# Altium PCB PCB2.PcbDoc
Units mil, origin at the board's own origin, x right, y up, seen from the top; angles counter-clockwise.
Board outline 3875 x 4900 mil, 2 copper layers (Top Layer, Bottom Layer); 33 components, 42 nets, 163 pads, 23 vias.
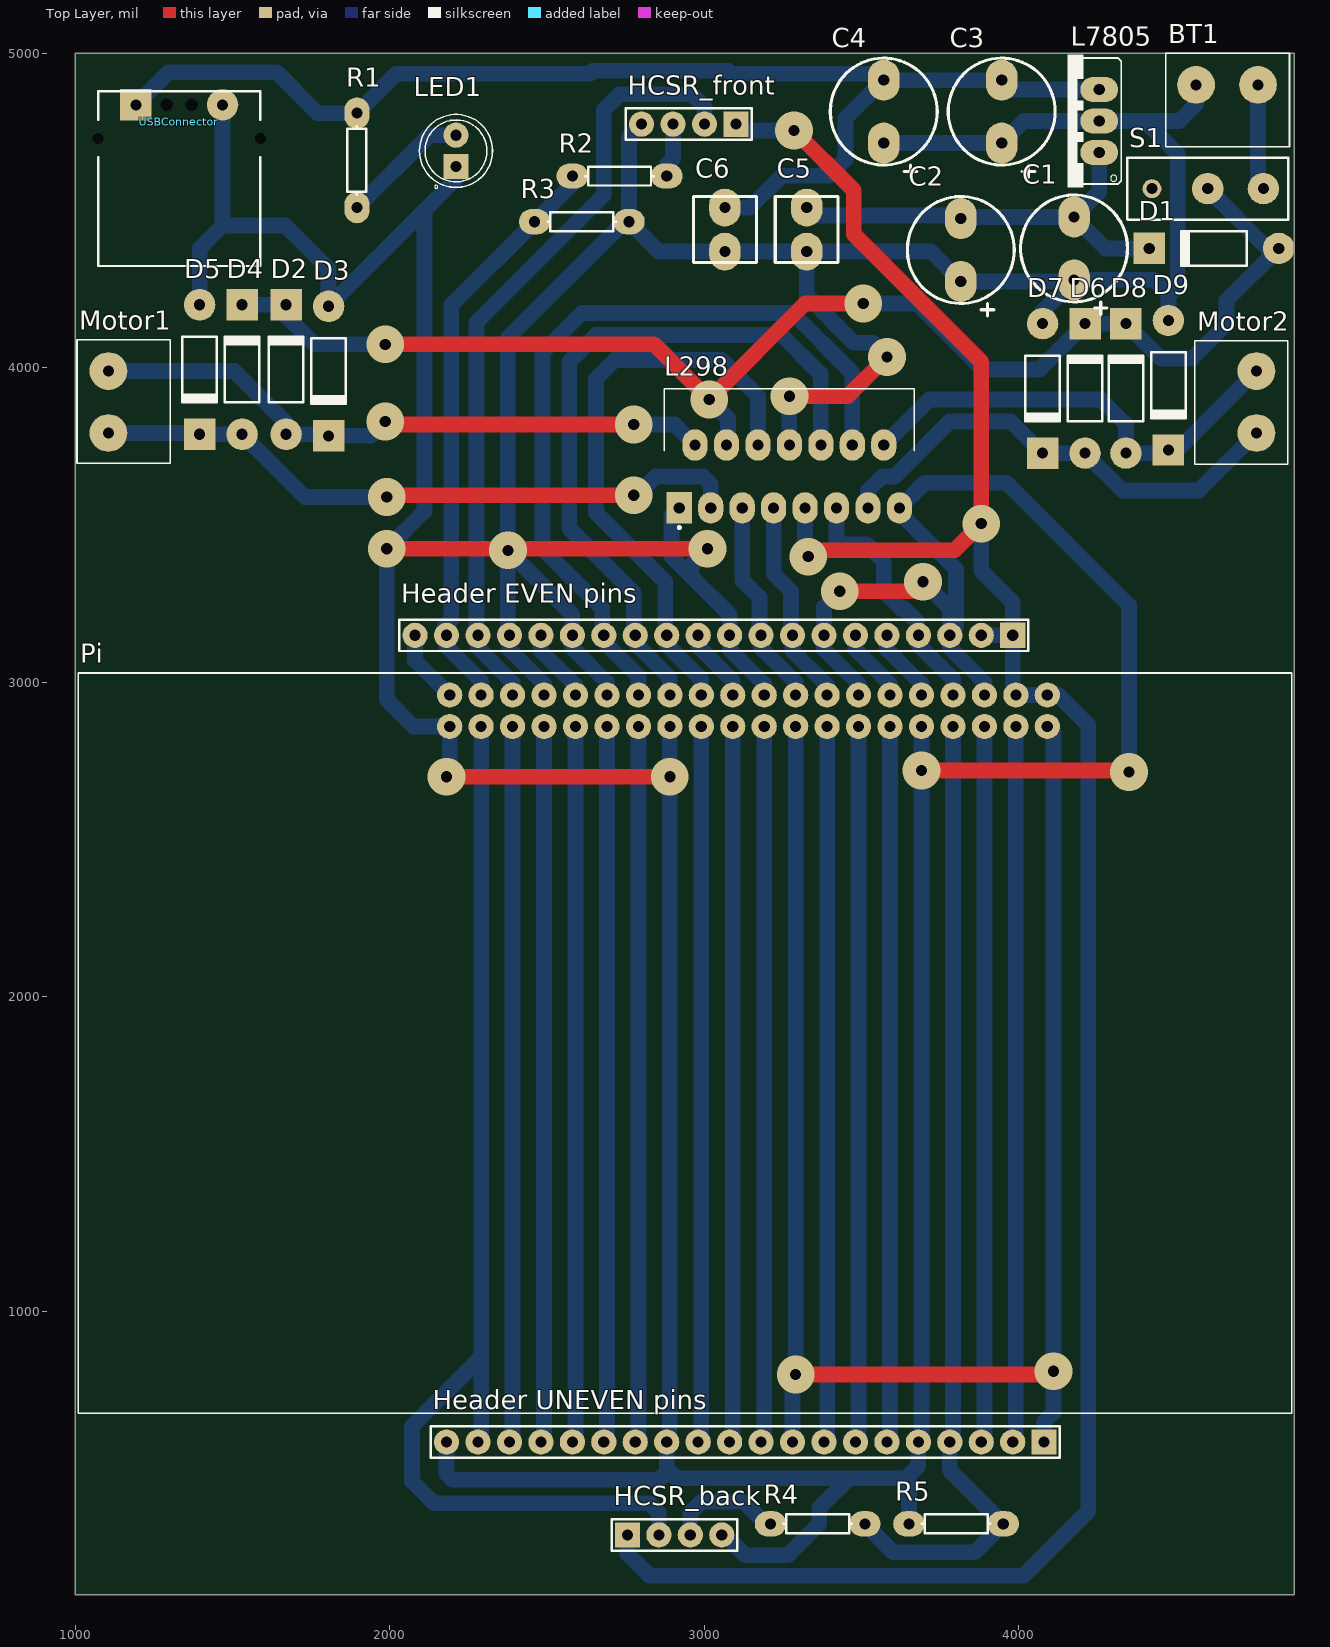
[diagram p0: Top Layer view]
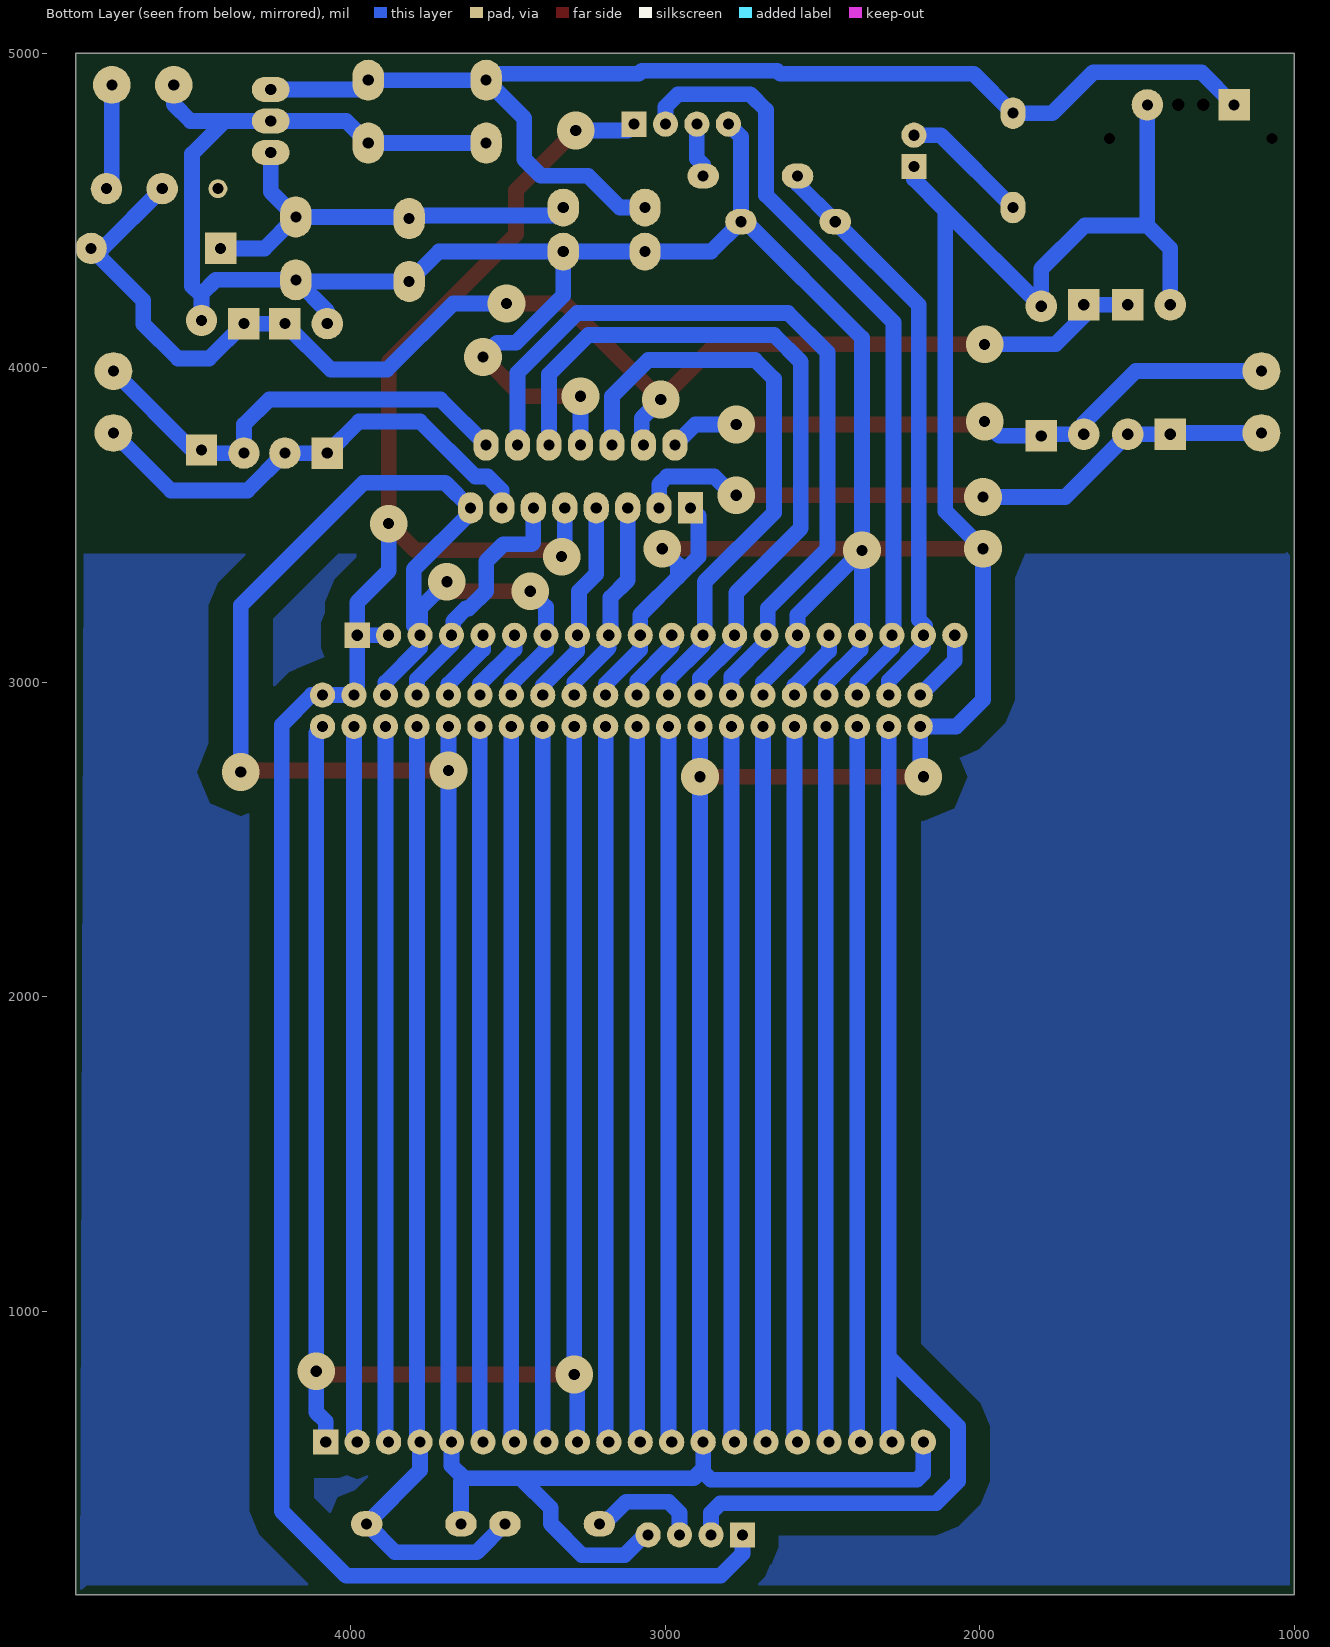
[diagram p1: Bottom Layer view, seen from below]

## Layer stack, top to bottom
Top Solder: solder mask 0.4, Solder Resist, Dk 3.5
Top Layer: signal copper 1.4
Dielectric 1: dielectric 12.6, FR-4, Dk 4.8
Bottom Layer: signal copper 1.4
Bottom Solder: solder mask 0.4, Solder Resist, Dk 3.5

## Board outline
1000,100 4875,100 4875,5000 1000,5000

## Design rules (kind name [scope] priority, off if disabled: settings)
Clearance Clearance_6 [InNamedPolygon('Bottom Layer-No Net')] p1: gap=70 ignorepadtopadclearanceinfootprint=FALSE
Clearance Clearance_5 [InNamedPolygon('Bottom Layer-No Net')] p2: gap=50 ignorepadtopadclearanceinfootprint=FALSE
Clearance Clearance_4 [InNamedPolygon('Bottom Layer-No Net')] p3: gap=50 ignorepadtopadclearanceinfootprint=FALSE
Clearance Clearance_3 [InNamedPolygon('Bottom Layer-No Net')] p4: gap=10 ignorepadtopadclearanceinfootprint=FALSE except(0: Arc-Hole Track-Hole SMDPad-Hole THPad-Hole Via-Hole Fill-Hole Poly-Hole Region-Hole Text-Hole; 50: Arc-Arc Arc-Track Arc-SMDPad Arc-THPad Arc-Via Arc-Fill Arc-Poly Arc-Region Arc-Text Track-Track Track-SMDPad Track-THPad Track-Via Track-Fill Track-Poly Track-Region Track-Text SMDPad-SMDPad)
Clearance Clearance_2 [InNamedPolygon('Bottom Layer-No Net')] p5: gap=10 ignorepadtopadclearanceinfootprint=FALSE except(0: Arc-Hole Track-Hole SMDPad-Hole THPad-Hole Via-Hole Fill-Hole Poly-Hole Region-Hole Text-Hole)
Clearance Clearance_1 [InNamedPolygon('Bottom Layer-No Net')] p6: gap=10 ignorepadtopadclearanceinfootprint=FALSE except(0: Arc-Hole Track-Hole SMDPad-Hole THPad-Hole Via-Hole Fill-Hole Poly-Hole Region-Hole Text-Hole)
Clearance [All] p7: gap=10 ignorepadtopadclearanceinfootprint=FALSE except(0: Arc-Hole Track-Hole SMDPad-Hole THPad-Hole Via-Hole Fill-Hole Poly-Hole Region-Hole Text-Hole)
PolygonConnect [All] p1: connectstyle=Relief reliefconductorwidth=10 reliefentries=4 polygonreliefangle="90 Angle" airgapwidth=10
RoutingVias [All] p1: holewidth=28 width=50 viastyle="Through Hole" minholewidth=28 minwidth=50 maxholewidth=28 maxwidth=50
SolderMaskExpansion [All] p1: expansion=4
Width [All] p1: maxlimit=50 minlimit=50 preferedwidth=50
30 further rules are at their usual default settings.

## Components (designator, comment, footprint, x,y, rotation, side; value= is the part's Value field where it differs from the comment)
BT1 "Battery" PCBComponent_1 4760,4900 r180 top
C1 "Cap Pol1" "Elektrolitski kondenzator" 4175,4480 r270 top value=470uF
C2 "Cap Pol1" "Elektrolitski kondenzator" 3815,4475 r270 top value=470uF
C3 "Cap Pol1" "Elektrolitski kondenzator" 3945,4915 r270 top value=470uF
C4 "Cap Pol1" "Elektrolitski kondenzator" 3570,4915 r270 top value=470uF
C5 "Cap" CAP140 3325,4370 r90 top value=100nF
C6 "Cap" CAP140 3065,4370 r90 top value=100pF
D1 "Diode 1N4007" DO-41 4620,4380 r180 top
D2 "Diode 1N5402" DO-41 1670,3995 r90 top
D3 "Diode 1N5402" DO-41 1805,3990 r270 top
D4 "Diode 1N5402" DO-41 1530,3995 r90 top
D5 "Diode 1N5402" DO-41 1395,3995 r270 top
D6 "Diode 1N5402" DO-41 4210,3935 r90 top
D7 "Diode 1N5402" DO-41 4075,3935 r270 top
D8 "Diode 1N5402" DO-41 4340,3935 r90 top
D9 "Diode 1N5402" DO-41 4475,3945 r270 top
HCSR_back "" HDR1X4 2755,290 r0 top
HCSR_front "" HDR1X4 3100,4775 r180 top
"Header EVEN pins" "Header 20" HDR1X20 3980,3150 r180 top
"Header UNEVEN pins" "Header 20" HDR1X20 4080,585 r180 top
L298 "L298N" TO127P2020X500X2100-15 2920,3555 r90 top
L7805 "L7805" 78XXS 4155,4785 r90 top
LED1 "*" LED_WP7113LGD 2210,4690 r90 top
Motor1 "Motor 1" PCBComponent_1 1105,3990 r270 top
Motor2 "Motor 2" PCBComponent_1 4755,3793.15 r90 top
Pi "RASPBERRY_PI_B+" PiMirror 2190,2960 r0 top
R1 "Res1" AXIAL-0.3 1895,4660 r90 top value=510
R2 "Res1" AXIAL-0.3 2730,4610 r0 top value=4K7
R3 "Res1" AXIAL-0.3 2610,4465 r180 top value=10K
R4 "Res1" AXIAL-0.3 3360,325 r180 top value=4K7
R5 "Res1" AXIAL-0.3 3800,325 r0 top value=10K
S1 "SW-SPST" Prekidac 4777.17,4570 r180 top
USBConnector "USB-A1HSW6" OST_USB-A1HSW6 1330,4580 r0 top

## Footprints (in the part's own frame and the unit in brackets; to place one, negate y for a bottom-side part, rotate by r counter-clockwise, add the part's x,y. Pads: shape width x height; smd on the part's side, far side on the other; paste and mask are expansions set on the pad)
78XXS [mil]
  oval 80x120 hole 35.43: GND(0,-100) IN(-100,-100) OUT(100,-100)
  silkscreen extent -210,-170 210,0
AXIAL-0.3 [mil] "Axial Device, Thru-Hole; 2 Leads; 0.3 in Pin Spacing"
  oval 100x80 hole 35.43: 1(-150,0) 2(150,0)
  silkscreen extent -109,-30 109,30
CAP140 [mil]
  oval 120x100 hole 35.43: 1(0,0) 2(140,0)
  silkscreen extent -35,-100 175,100
DO-41 [mm] "Diode, Axial; Body 5.2 x 2.7 mm (LxDia. max), Lead Dia. 0.86 mm (max)"
  round 2.54 hole 0.9: 1(-5.23,0)
  rect 2.54x2.54 hole 0.9: 2(5.23,0)
  silkscreen extent -2.65,-1.4 2.75,1.4
"Elektrolitski kondenzator" [mil]
  oval 130x100 hole 35.43: 1(0,0) 2(200,0)
  silkscreen extent -70,-170 310,170
HDR1X4 [mil] "Connector; Header; 4 Position"
  rect 80x80 hole 35.43: 1(0,0)
  round 80 hole 35.43: 2(100,0) 3(200,0) 4(300,0)
  silkscreen extent -50,-50 350,50
HDR1X20 [mil] "Connector; Header; 20 Position"
  rect 80x80 hole 35.43: 1(0,0)
  round 80 hole 35.43: 2(100,0) 3(200,0) 4(300,0) 5(400,0) 6(500,0) 7(600,0) 8(700,0) 9(800,0) 10(900,0) 11(1000,0) 12(1100,0) 13(1200,0) 14(1300,0) 15(1400,0) 16(1500,0) 17(1600,0) 18(1700,0) 19(1800,0) 20(1900,0)
  silkscreen extent -50,-50 1950,50
LED_WP7113LGD [mil]
  round 80 hole 35.43: A(50,0)
  rect 80x80 hole 35.43: C(-50,0)
  silkscreen extent -119,-116 116,116
OST_USB-A1HSW6 [mm]
  rect 2.54x2.54 hole 0.9: 1(-3.5,6.51)
  round 0 hole 1: 2(-1,6.51) 3(1,6.51)
  round 2.54 hole 0.9: 4(3.5,6.51)
  round 0 hole 0.9 unplated: ""(-6.57,3.8) ""(6.57,3.8)
  silkscreen extent -6.55,-6.5 6.55,7.6, body extent -7.9,0 7.9,14.1, height 3.56
PCBComponent_1 [mil]
  round 120 hole 35.43: 1(0,0) 2(196.85,0)
  silkscreen extent -100,-100 294,197
PiMirror [mil]
  round 80 hole 35.43: 1(1900,-100) 2(1900,0) 3(1800,-100) 4(1800,0) 5(1700,-100) 6(1700,0) 7(1600,-100) 8(1600,0) 9(1500,-100) 10(1500,0) 11(1400,-100) 12(1400,0) 13(1300,-100) 14(1300,0) 15(1200,-100) 16(1200,0) 17(1100,-100) 18(1100,0) 19(1000,-100) 20(1000,0) 21(900,-100) 22(900,0) 23(800,-100) 24(800,0) 25(700,-100) 26(700,0) 27(600,-100) 28(600,0) 29(500,-100) 30(500,0) 31(400,-100) 32(400,0) 33(300,-100) 34(300,0) 35(200,-100) 36(200,0) 37(100,-100) 38(100,0) 39(0,-100) 40(0,0)
  silkscreen extent -1181,-2283 2677,70
Prekidac [mm]
  round 2.54 hole 0.9: 1(0,0) 2(4.5,0)
  round 1.524 hole 0.9: 3(9,0)
  silkscreen extent -2,-2.5 11,2.5
TO127P2020X500X2100-15 [mil]
  rect 100x80 hole 35.43: 1(0,0)
  oval 100x80 hole 35.43: 2(200,-50) 3(0,-100) 4(200,-150) 5(0,-200) 6(200,-250) 7(0,-300) 8(200,-350) 9(0,-400) 10(200,-450) 11(0,-500) 12(200,-550) 13(0,-600) 14(200,-650) 15(0,-700)
  silkscreen extent -67,-748 379,48

## Part data
BT1: "Multicell Battery", LatestRevisionDate=17-Jul-2002, LatestRevisionNote="Re-released for DXP Platform.", PackageDescription="Battery; 2 Leads", PackageReference=BAT-2, Published=24-Mar-1999, Publisher="Altium Limited"
C1 C2 C3 C4: "Polarized Capacitor (Radial)", LatestRevisionDate=17-Jul-2002, LatestRevisionNote="Re-released for DXP Platform.", PackageDescription="Polarized Capacitor (Radial); 2 Leads", PackageReference=RB7.6-15, Published=8-Jun-2000, Publisher="Altium Limited"
C5 C6: "Capacitor", LatestRevisionDate=17-Jul-2002, LatestRevisionNote="Re-released for DXP Platform.", PackageDescription="Radial Cap, Thru-Hole; 2 Leads; 0.3 in Pin Spacing", PackageReference=RAD-0.3, Published=8-Jun-2000, Publisher="Altium Limited"
D1: "1 Amp General Purpose Rectifier", Code_JEDEC=DO-204-AL, ComponentLink1Description="Manufacturer Link", ComponentLink1URL=http://www.fairchildsemi.com/, ComponentLink2Description=Datasheet, ComponentLink2URL=http://www.fairchildsemi.com/ds/1N%2F1N4001.pdf, DatasheetVersion=1998, LatestRevisionDate=17-Jul-2002, LatestRevisionNote="Re-released for DXP Platform.", PackageDescription="Diode, Axial; Body 5.2 x 2.7 mm (LxDia. max), Lead Dia. 0.86 mm (max)", PackageReference=DO-41, PackageVersion=Aug-1999, Published=8-Jun-2000, Publisher="Altium Limited"
D2 D3 D4 D5 D6 D7 D8 D9: "3 Amp General Purpose Rectifier", ComponentLink1Description="Manufacturer Link", ComponentLink1URL=http://www.fairchildsemi.com/, ComponentLink2Description=Datasheet, ComponentLink2URL=http://www.fairchildsemi.com/ds/1N%2F1N5400.pdf, DatasheetVersion=1998, LatestRevisionDate=17-Jul-2002, LatestRevisionNote="Re-released for DXP Platform.", PackageDescription="Diode, Axial; Body 9.5 x 5.6 mm (LxDia. max), Lead Dia. 1.32 mm (max)", PackageReference=DO-201AD, PackageVersion=Aug-1999, Published=8-Jun-2000, Publisher="Altium Limited"
HCSR_back HCSR_front: library part HC-SR04
"Header EVEN pins" "Header UNEVEN pins": "Header, 20-Pin", LatestRevisionDate=17-Jul-2002, LatestRevisionNote="Re-released for DXP Platform.", Publisher="Altium Limited"
L298: "Dual Full Bridge Motor Driver 15-Pin(15+Tab) MULTIWATT V Tube", Package=None, Availability=Unavailable, MP=L298N, Price=None
L7805: "Linear Voltage Regulator IC 1 Output 1.5A D2PAK", Package="TO-263-3 Inchange Semiconductor", Availability=Unavailable, MF=STMicroelectronics, MP=L7805, Price=None, SnapEDA_Link=https://www.snapeda.com/parts/L7805/STMicroelectronics/view-part/563125/?ref=snap
LED1: library part WP7113LGD, Package="Radial Kingbright", Availability="In Stock", Check_prices=https://www.snapeda.com/parts/WP7113LGD/Kingbright/view-part/?ref=eda, MF=Kingbright, MP=WP7113LGD, Price=None, Purchase-URL=https://pricing.snapeda.com/search/part/WP7113LGD/?ref=eda, SnapEDA_Link=https://www.snapeda.com/parts/WP7113LGD/Kingbright/view-part/?ref=snap
Motor1 Motor2: library part "Header 2", "Header, 2-Pin", LatestRevisionDate=17-Jul-2002, LatestRevisionNote="Re-released for DXP Platform.", Publisher="Altium Limited"
Pi: "BCM2835 Raspberry Pi Model B+ - ARM11, VideoCore MPU Embedded Evaluation Board", Package=None, Availability=Unavailable, BuyPart=https://www.snapeda.com/parts/RASPBERRY%20PI%20B+/Raspberry%20Pi/view-part/559759/?ref=eda, MF="Raspberry Pi", MP="RASPBERRY PI B+", Price=None, SnapEDA_Link=https://www.snapeda.com/parts/RASPBERRY%20PI%20B+/Raspberry%20Pi/view-part/559759/?ref=snap
R1 R2 R3 R4 R5: "Resistor", LatestRevisionDate=17-Jul-2002, LatestRevisionNote="Re-released for DXP Platform.", PackageDescription="Axial Device, Thru-Hole; 2 Leads; 0.3 in Pin Spacing", PackageReference=AXIAL-0.3, Published=8-Jun-2000, Publisher="Altium Limited"
S1: "Single-Pole, Single-Throw Switch", LatestRevisionDate=17-Jul-2002, LatestRevisionNote="Re-released for DXP Platform.", PackageDescription="Switch; 2 Leads", PackageReference=SPST-2, Published=24-Mar-1999, Publisher="Altium Limited"
USBConnector: "USB-A (USB TYPE-A) - Receptacle Connector 4 Position Through Hole, Right Angle", Package=None, Availability="In Stock", Check_prices=https://www.snapeda.com/parts/USB-A1HSW6/On+Shore+Technology+Inc./view-part/?ref=eda, MF="On Shore", MP=USB-A1HSW6, Price=None, Purchase-URL=https://pricing.snapeda.com/search/part/USB-A1HSW6/?ref=eda, SnapEDA_Link=https://www.snapeda.com/parts/USB-A1HSW6/On+Shore+Technology+Inc./view-part/?ref=snap

## Via types
v1: diameter 120, hole 35.43, Top Layer to Bottom Layer, 23 vias

## Nets (pads, with @x,y where several pads share a name; then routed paths per layer and width w, separated by ;. In a path a pad name is that pad's centre, name@x,y a point inside that pad or via, vN(x,y) a via of type N, cw(c..) or ccw(c..) an arc to the next point about the centre after c; other vN are vias at no path point)
"+3V3 Pi": "Header UNEVEN pins.1" "Header UNEVEN pins.9" Pi.1 Pi.17 | length 5413.1
  Top Layer w50: v1(3290,800) 4100,800 v1(4110,810)
  Bottom Layer w50: 3280,585 3280,790 v1(3290,800) Pi.17 ; 4090,595 4080,585 4080,650 4110,680 v1(4110,810) 4110,2840 Pi.1
+5V: C3.1 C4.1 C6.2 L7805.OUT R1.2 USBConnector.1 | length 3989.3
  Bottom Layer w50: USBConnector.1 1295.91,4940 1640,4940 1770,4810 R1.2 2020,4935 2635,4935 2645,4945 3075,4945 3085,4935 3550,4935 C4.1 ; C6.2 3145,4510 3246.25,4611.25 3396.25,4611.25 3448.75,4663.75 3448.75,4793.75 C4.1 ; L7805.OUT 3975,4885 C3.1 C4.1
"+5V Pi": "Header EVEN pins.1" "Header EVEN pins.2" HCSR_back.1 HCSR_front.1 L298.9 Pi.2 Pi.4 | length 7512.1
  Top Layer w50: v1(3285,4755) 3475,4565 3475,4425 3880,4020 v1(3880,3505) 3795,3420 3350,3420 v1(3330,3400)
  Bottom Layer w50: HCSR_back.1 2755,230 2825,160 4015,160 4220,365 4220,2865 4125,2960 Pi.2 Pi.4 3980,2970 3980,3150 ; HCSR_front.1 3120,4755 v1(3285,4755) ; v1@3320,3425 L298.9 ; 3880,3150 3980,3150 ; v1(3880,3505) 3880,3355 3980,3255 3980,3150
+12V: D1.1 D2.2 D4.2 D6.2 D8.2 L298.4 S1.2 | length 4426.2
  Top Layer w50: v1(1985,4075) 2840,4075 v1(3015,3900) 3320,4205 v1(3505,4205)
  Bottom Layer w50: D4.2 D2.2 1670,4165 1760,4075 v1(1985,4075) ; v1(3015,3900) 3075,3840 3075,3760 L298.4 ; v1(3505,4205) 3675,4205 3885,3995 4064.09,3995 D6.2 D8.2 4450.91,4030 4550,4030 4660,4140 4660,4214.09 D1.1 4790,4380 S1.2
GND: "Header EVEN pins.3" "Header EVEN pins.7" "Header EVEN pins.10" "Header EVEN pins.15" "Header EVEN pins.17" "Header UNEVEN pins.5" "Header UNEVEN pins.13" "Header UNEVEN pins.20" BT1.2 C1.2 C2.2 C3.2 C4.2 C5.1 C6.1 D3.1 D5.1 D7.1 D9.1 HCSR_back.4 HCSR_front.4 L298.1 L298.8 L298.15 L7805.GND LED1.C Pi.6 Pi.9 Pi.14 Pi.20 Pi.25 Pi.30 Pi.34 Pi.39 R3.1 R5.1 USBConnector.4 | length 24568.1
  Top Layer w50: v1(1990,3425) 2370,3425 v1(2375,3420) 2380,3425 v1(3010,3425) ; v1(2180,2700) v1(2890,2700) ; v1(3270,3910) 3455,3910 v1(3580,4035) ; v1(3430,3290) 3665,3290 v1(3695,3320) ; v1(3690,2720) 4345,2720 v1(4350,2715)
  Bottom Layer w50: D5.1 1395,4380 1467.8,4452.8 ; USBConnector.4 1467.8,4452.8 ; 2180,585 2180,485 2200,465 2855,465 2880,490 2880,500 ; v1(2180,2700) 2190,2710 Pi.39 2075,2860 1990,2945 v1(1990,3425) 2110,3545 2110,4500.91 ; LED1.C 2210,4600.91 2110,4500.91 ; Pi.34@2480,2970 Pi.34 2490,2995 2380,3105 2380,3150 2375,3155 v1(2375,3420) ; Pi.30 2690,3000 2580,3110 2580,3150 2580,3215 v1(2375,3420) ; HCSR_front.4 2760,4735 R3.1 ; Pi.25 v1(2890,2700) 2890,595 2880,585 2880,500 ; L298.1 2895,3530 2895,3400 2960,3335 ; v1(3010,3425) 2960,3375 2960,3335 ; HCSR_back.4 3065,290 3130,225 3265,225 3365,325 3365,375 3460,470 ; Pi.20 3190,2995 3080,3105 3080,3150 3080,3215 2960,3335 ; L298.8 v1(3270,3910) ; v1(3430,3290) 3380,3240 3380,3150 3380,3105 3490,2995 Pi.14 ; C4.2 C3.2 4015,4785 L7805.GND 4400,4785 ; v1(3580,4035) 3535,4080 3475,4080 3325,4230 C5.1 ; R5.1 3650,460 3640,470 ; Pi.9 v1(3690,2720) 3690,595 3680,585 3680,510 3640,470 ; v1(3695,3320) 3780,3235 3780,3150 3780,3110 3890,3000 Pi.6 ; 3800,3180 3800,3360 3620,3540 L298.15 3700,3635 3960,3635 4350,3245 v1(4350,2715) ; D7.1 4075,4180 C1.2@4170,4275 ; D9.1 4475,4235 ; BT1.2 4563.15,4838.15 4510,4785 4400,4785 ; 1467.8,4452.8 1667.2,4452.8 1805,4315 D3.1 2110,4500.91 ; v1(2375,3420) 2375,4095 2745,4465 R3.1 ; R3.1 2855,4370 C6.1 C5.1 ; 2880,500 2910,470 3460,470 ; C5.1 3720,4370 C2.2 C1.2@4170,4275 ; 3460,470 3640,470 ; C1.2@4170,4275 C1.2 4430,4280 4475,4235 ; 4400,4785 4505,4680 4505,4260 4480,4235 4475,4235
GPIO0: "Header UNEVEN pins.6" Pi.11 | length 2279.1
  Bottom Layer w50: 3580,585 3590,595 Pi.11
GPIO1: "Header EVEN pins.6" Pi.12 | length 235.6
  Bottom Layer w50: 3480,3150 3480,3105 3590,2995 Pi.12
GPIO2: "Header UNEVEN pins.7" Pi.13 | length 2279.1
  Bottom Layer w50: 3480,585 3490,595 Pi.13
GPIO3: "Header UNEVEN pins.8" Pi.15 | length 2279.1
  Bottom Layer w50: 3380,585 3390,595 Pi.15
GPIO4: "Header EVEN pins.8" L298.7 Pi.16 | length 643.3
  Bottom Layer w50: L298.7 3220,3345 3275,3290 3275,3170 ; 3280,3150 3280,3100 3390,2990 Pi.16
GPIO5: "Header EVEN pins.9" L298.5 Pi.18 | length 638.3
  Bottom Layer w50: L298.5 3120,3325 3175,3270 3175,3175 ; 3180,3150 3180,3110 3290,3000 Pi.18
GPIO6: "Header EVEN pins.11" Pi.22 | length 235.6
  Bottom Layer w50: 2980,3150 2980,3115 3090,3005 Pi.22
GPIO7: "Header UNEVEN pins.4" Pi.7 R4.1 R5.2 | length 3124.1
  Bottom Layer w50: R4.1 3600,235 3860,235 R5.2 3780,495 3780,585 3790,595 Pi.7
GPIO10: "Header EVEN pins.12" L298.6 Pi.24 | length 1859.2
  Bottom Layer w50: 2875,3175 2875,3320 2655,3540 2655,3965 2715,4025 3055,4025 3170,3910 L298.6 ; 2880,3150 2880,3120 2990,3010 Pi.24
GPIO11: "Header EVEN pins.13" L298.10 Pi.26 | length 2272.5
  Bottom Layer w50: 2775,3180 2775,3285 2570,3490 2570,4020 2655,4105 3245,4105 3370,3980 L298.10 ; 2780,3150 2780,3125 2890,3015 Pi.26
GPIO12: "Header UNEVEN pins.10" Pi.19 | length 2279.1
  Bottom Layer w50: 3180,585 3190,595 Pi.19
GPIO13: "Header UNEVEN pins.11" Pi.21 | length 2279.1
  Bottom Layer w50: 3080,585 3090,595 Pi.21
GPIO14: "Header UNEVEN pins.12" Pi.23 | length 2279.1
  Bottom Layer w50: 2980,585 2990,595 Pi.23
GPIO15: "Header EVEN pins.4" L298.11 Pi.8 | length 790.1
  Bottom Layer w50: L298.11 3420,3444.35 3425,3439.35 3515.65,3439.35 3570,3385 3570,3290 3625,3235 3635,3235 3675,3195 3675,3165 ; 3680,3150 3680,3120 3790,3010 Pi.8
GPIO16: "Header EVEN pins.5" Pi.10 | length 235.6
  Bottom Layer w50: 3580,3150 3580,3105 3690,2995 Pi.10
GPIO21: "Header UNEVEN pins.15" Pi.29 | length 2279.1
  Bottom Layer w50: 2680,585 2690,595 Pi.29
GPIO22: "Header UNEVEN pins.16" Pi.31 | length 2279.1
  Bottom Layer w50: 2580,585 2590,595 Pi.31
GPIO23: "Header UNEVEN pins.17" Pi.33 | length 2279.1
  Bottom Layer w50: 2480,585 2490,595 Pi.33
GPIO24: "Header UNEVEN pins.18" Pi.35 | length 2279.1
  Bottom Layer w50: 2380,585 2390,595 Pi.35
GPIO25: "Header UNEVEN pins.19" HCSR_back.2 Pi.37 | length 3661.7
  Bottom Layer w50: 2280,585 2290,595 2290,855 ; Pi.37 2290,855 ; HCSR_back.2 2855,360 2825,390 2140,390 2070,460 2070,635 2290,855
GPIO26: "Header EVEN pins.16" Pi.32 | length 249.7
  Bottom Layer w50: 2480,3150 2480,3100 2590,2990 Pi.32 Pi.32@2580,2970
GPIO27: "Header EVEN pins.18" HCSR_front.2 Pi.36 | length 2455.6
  Bottom Layer w50: 2275,3180 2275,4145 2680,4550 2680,4820 2730,4870 2960,4870 3000,4830 HCSR_front.2 ; 2280,3150 2280,3110 2390,3000 Pi.36
GPIO28: "Header EVEN pins.19" Pi.38 R2.1 R3.2 | length 1833.3
  Bottom Layer w50: 2175,3180 2195,3200 2195,4200 R3.2 2580,4585 R2.1 ; 2180,3150 2180,3115 2290,3005 Pi.38
GPIO29: "Header EVEN pins.20" Pi.40 | length 235.6
  Bottom Layer w50: 2080,3150 2080,3070 Pi.40
GPIO30: "Header UNEVEN pins.14" Pi.27 | length 2279.1
  Bottom Layer w50: 2780,585 2790,595 Pi.27
GPIO31: "Header EVEN pins.14" L298.12 Pi.28 | length 2529.7
  Bottom Layer w50: 2675,3180 2675,3235 2485,3425 2485,4050 2610,4175 3280,4175 3470,3985 L298.12 ; 2680,3150 2680,3130 2790,3020 Pi.28
NetBT1_1: BT1.1 S1.1 | length 337.1
  Bottom Layer w50: BT1.1 4760,4587.17 S1.1
NetC1_1: C1.1 C2.1 C5.2 D1.2 L7805.IN | length 1385.2
  Bottom Layer w50: C5.2 3350,4485 3805,4485 C2.1 3820,4480 C1.1 ; L7805.IN 4255,4560 C1.1 ; D1.2 4275,4380 C1.1
NetHCSR_back_3: HCSR_back.3 R4.2 | length 368.5
  Bottom Layer w50: HCSR_back.3 2955,360 2990,395 3125,395 3195,325 R4.2
NetHCSR_front_3: HCSR_front.3 R2.2 | length 173.3
  Bottom Layer w50: R2.2 2880,4645 2900,4665 HCSR_front.3
NetLED1_A: LED1.A R1.1 | length 410.3
  Bottom Layer w50: R1.1 2125,4740 LED1.A
OUT1: D2.1 D3.2 L298.2 Motor1.1 | length 2021.4
  Top Layer w50: v1(1985,3830) 1995,3820 v1(2775,3820)
  Bottom Layer w50: Motor1.1 1505,3990 1670,3825 D2.1 1800,3789.09 D3.2 1939.09,3784.09 v1(1985,3830) ; v1(2775,3820) 2905,3820 L298.2
OUT2: D4.1 D5.2 L298.3 Motor1.2 | length 2111.4
  Top Layer w50: v1(1990,3590) 1995,3595 v1(2775,3595)
  Bottom Layer w50: Motor1.2 1390.94,3793.15 D5.2 D4.1 1729.09,3590 v1(1990,3590) ; v1(2775,3595) 2785,3595 2845,3655 2995,3655 3020,3630 L298.3
OUT3: D6.1 D7.2 L298.13 Motor2.1 | length 1548.1
  Bottom Layer w50: L298.13 3520,3610 3565,3655 3605,3655 3780,3830 3974.09,3830 D7.2 D6.1 4329.09,3610 4571.85,3610 Motor2.1
OUT4: D8.1 D9.2 L298.14 Motor2.2 | length 1477.2
  Bottom Layer w50: L298.14 3715,3900 4260,3900 4340,3820 D8.1 4465,3729.09 D9.2 4504.09,3739.09 Motor2.2
SCL: "Header UNEVEN pins.3" Pi.5 | length 2279.1
  Bottom Layer w50: 3880,585 3890,595 Pi.5
SDA: "Header UNEVEN pins.2" Pi.3 | length 2279.1
  Bottom Layer w50: 3980,585 3990,595 Pi.3
pads on no net: S1.3 USBConnector. USBConnector.2 USBConnector.3

## Polygon pours and split planes (outlines as drawn)
no net on Bottom Layer "Bottom Layer-No Net" (solid, pour order 4): 4860,110 4840,130 1015,130 1015,3405 1025,3415 1030,3410 4850,3410

## Text inside footprints (layer, text, board x,y; h text height)
L7805: Mechanical 13 "-" at 4305.08,4759.99 h50.03 r90; Mechanical 13 "I" at 4305.19,4659.84 h50.06 r90; Mechanical 13 "O" at 4305.12,4860.06 h50.04 r90